# Altium PCB ESP32headerboard.PcbDoc
Units mm, origin at the board's own origin, x right, y up, seen from the top; angles counter-clockwise.
Board outline 60 x 60 mm, 2 copper layers (Top Layer, Bottom Layer); 6 components, 40 nets, 97 pads, 0 vias.
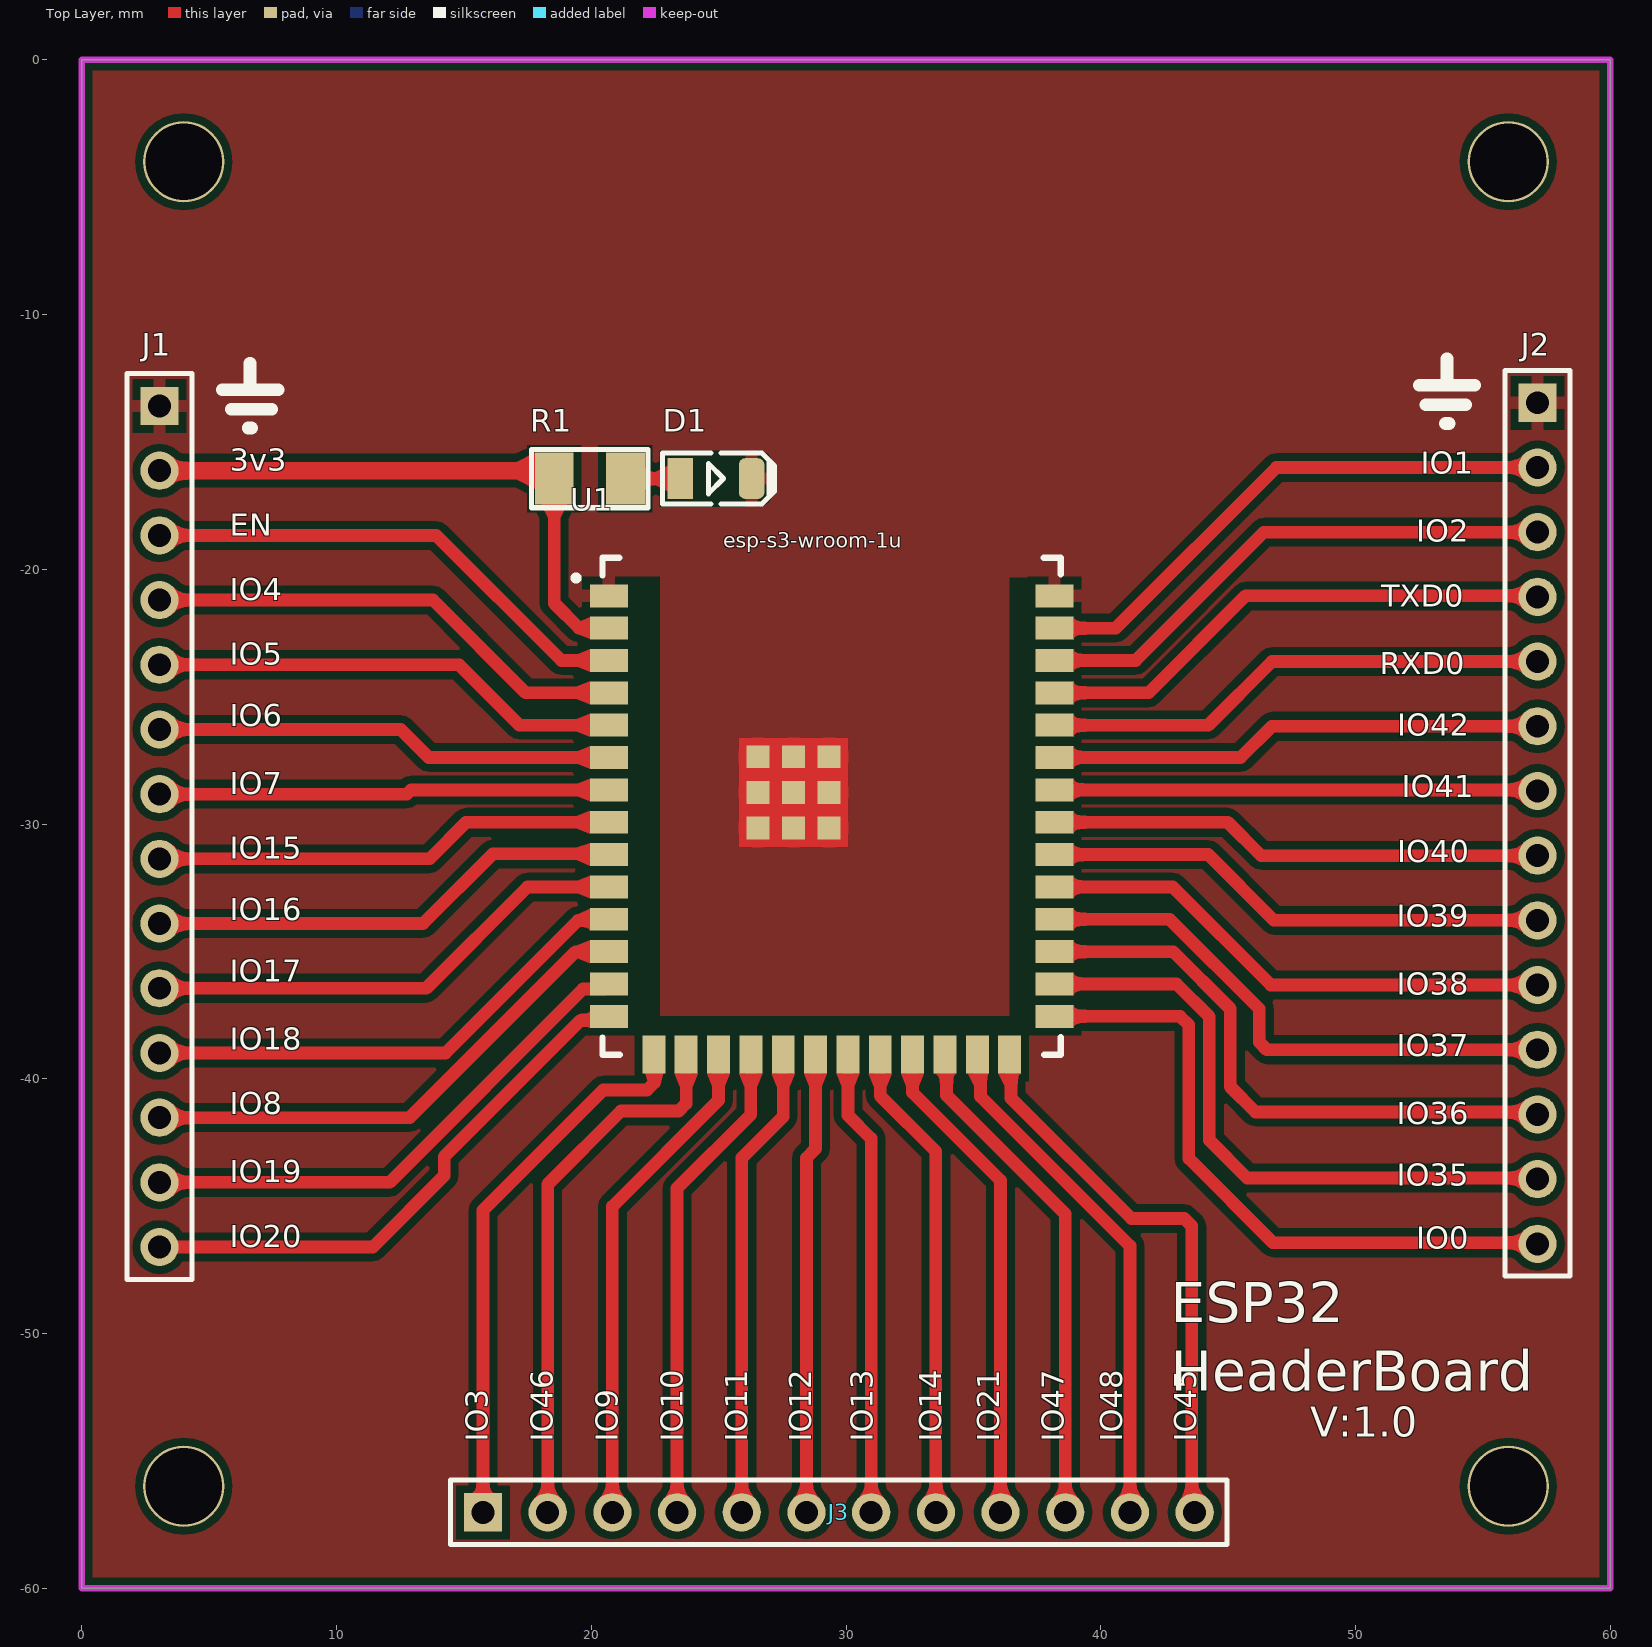
[diagram p0: Top Layer view]
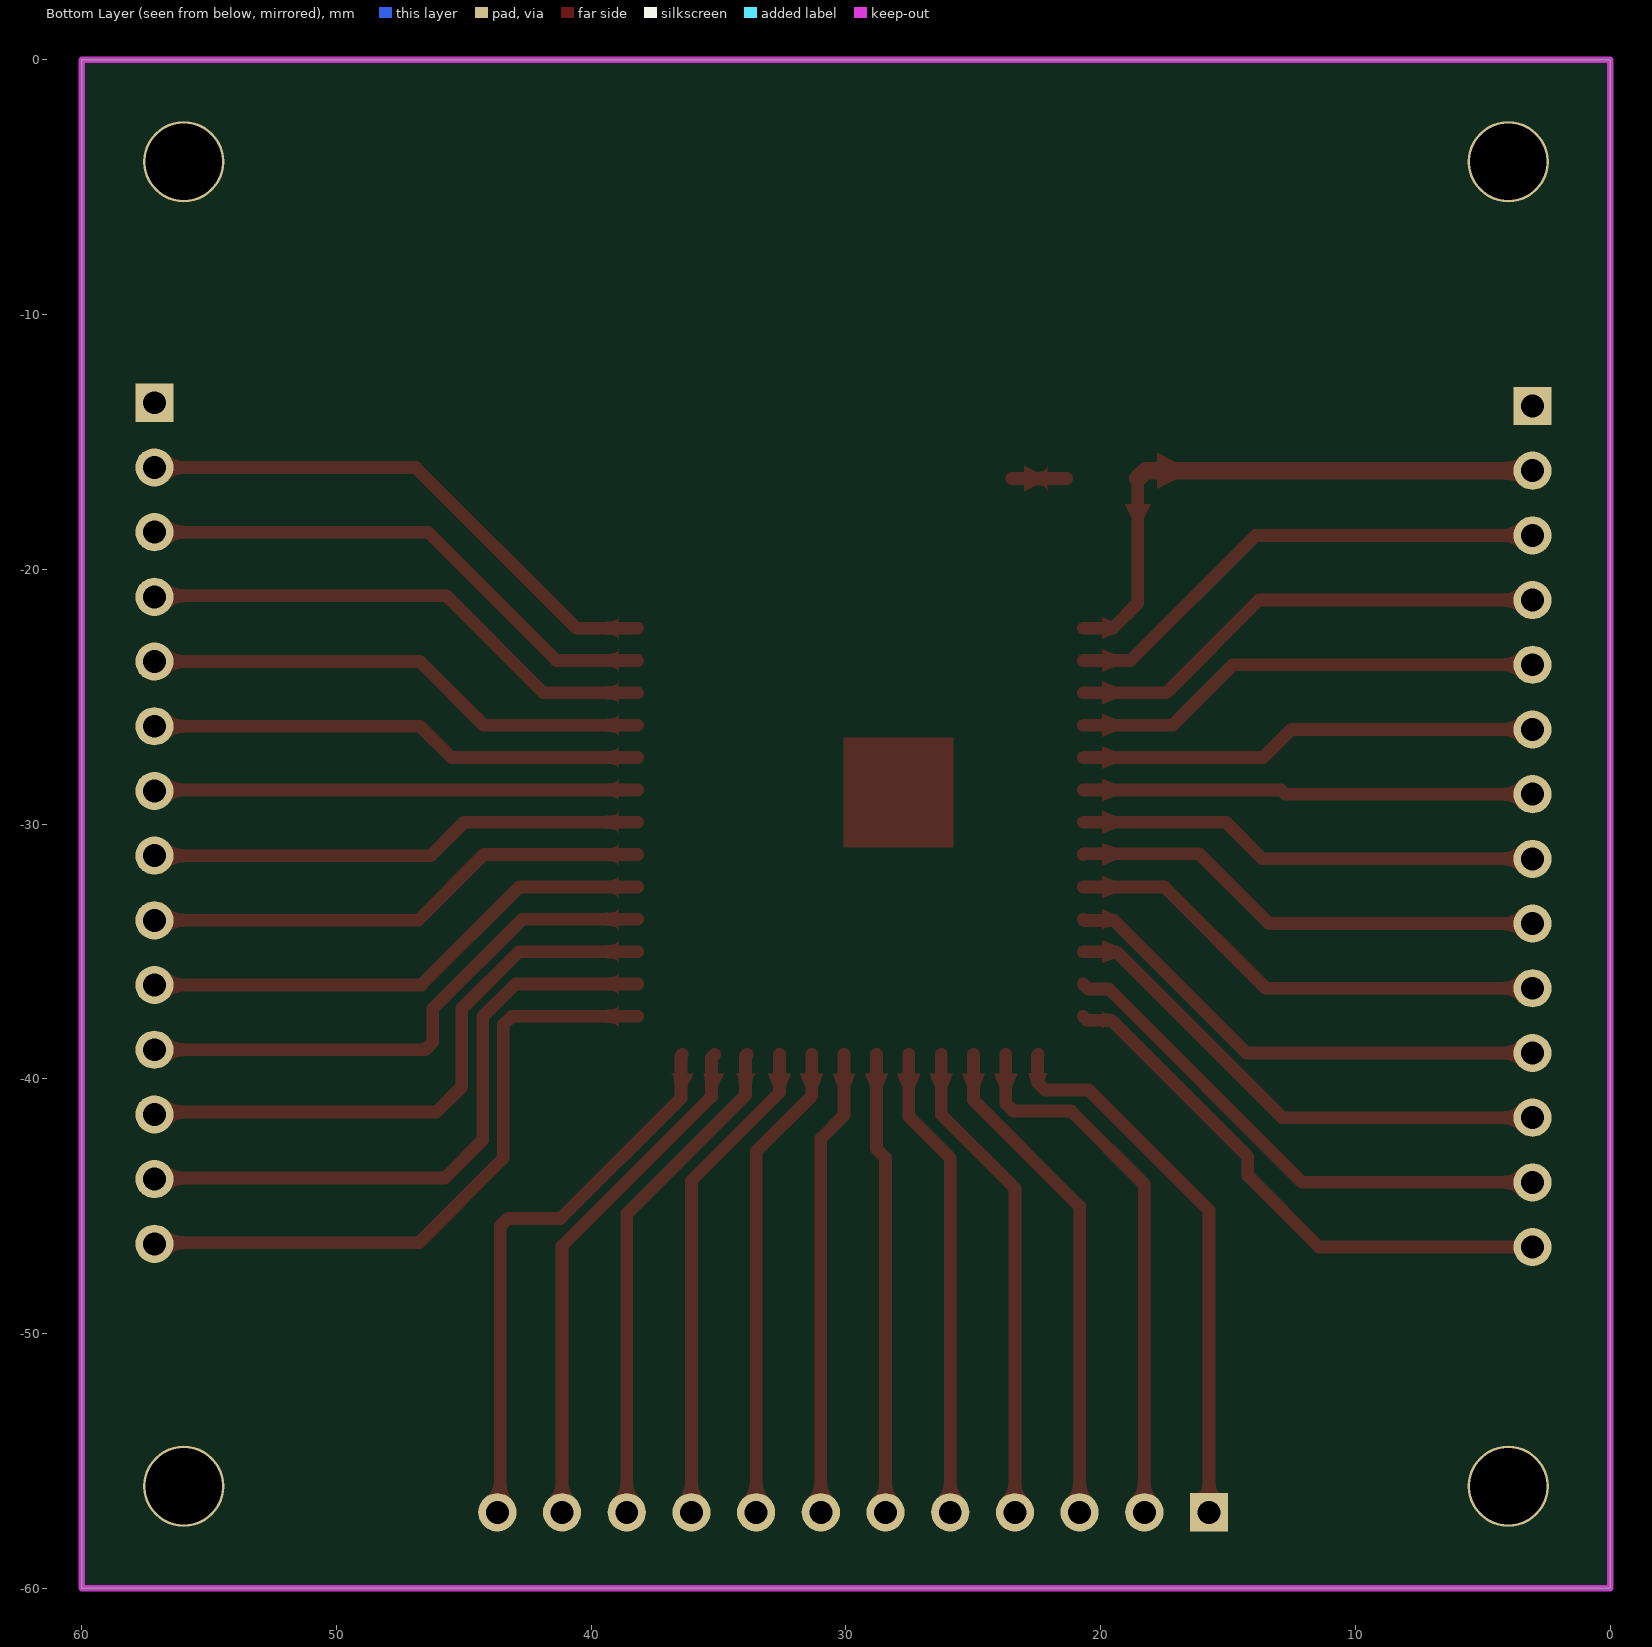
[diagram p1: Bottom Layer view, seen from below]
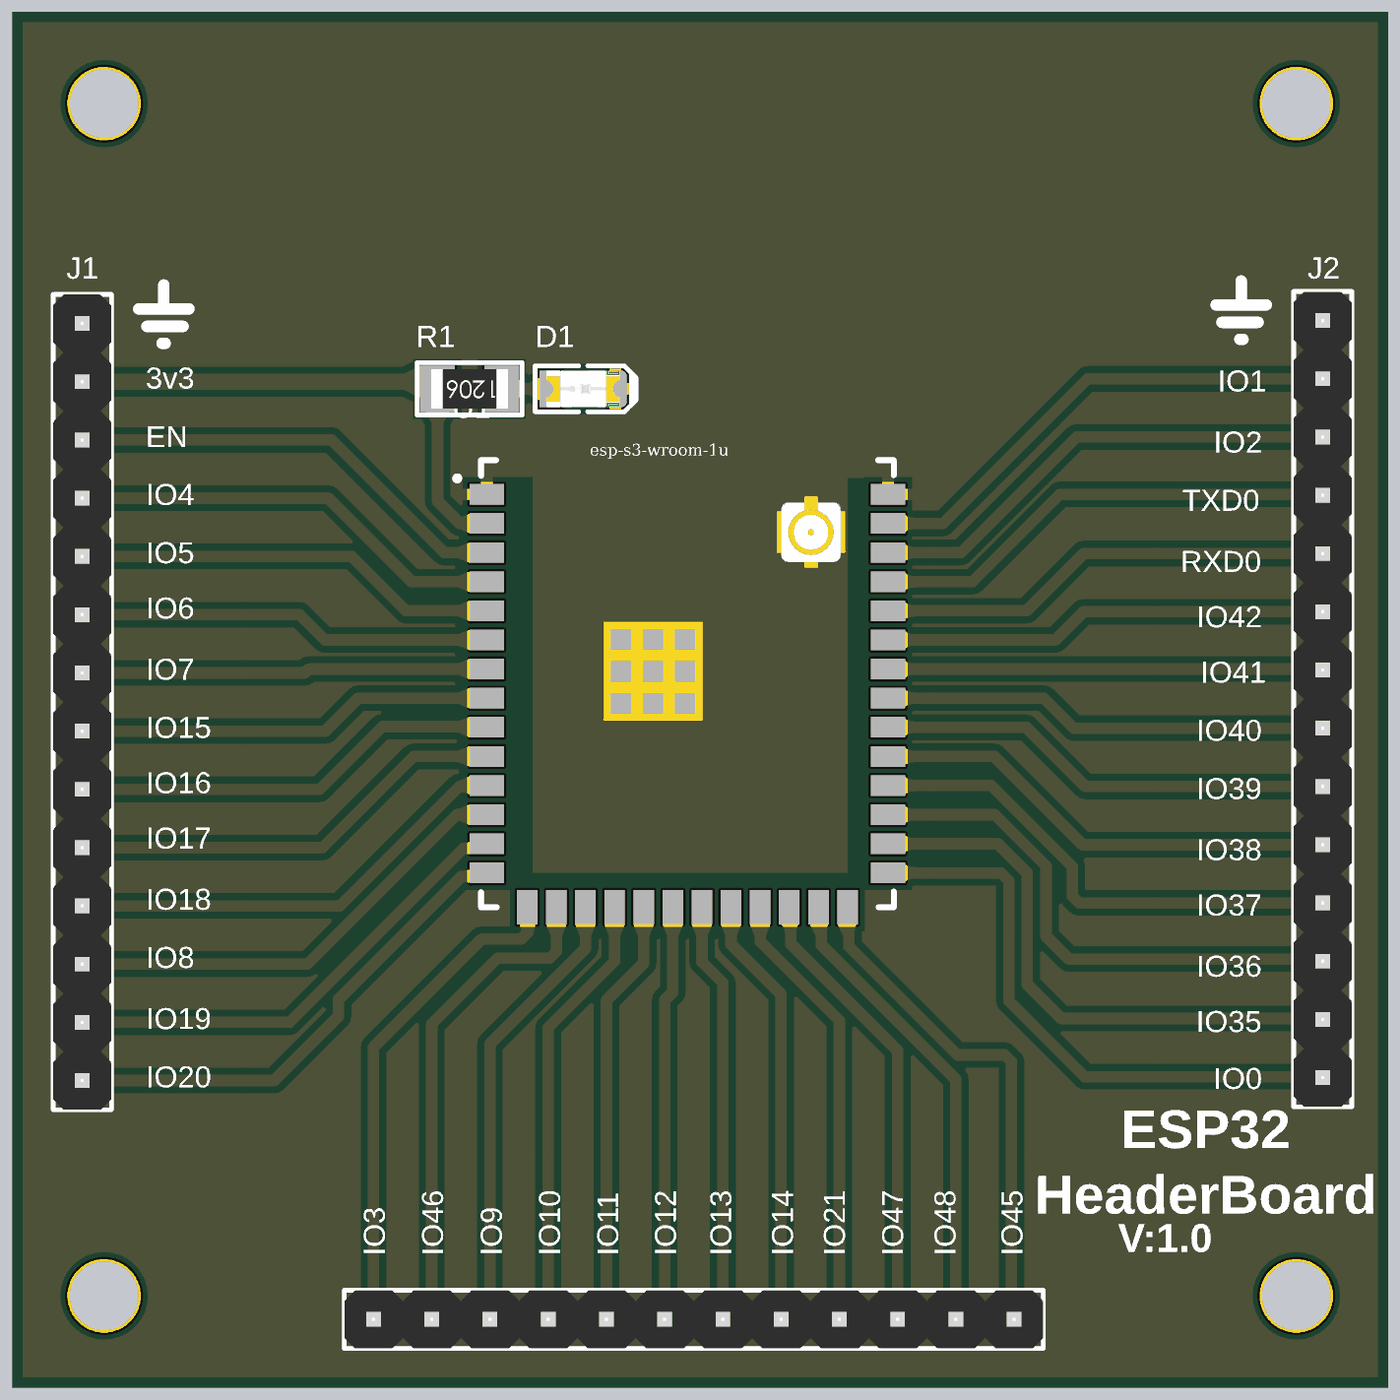
[diagram p2: 3D render of the assembled board from above, using the file's embedded part models]

## Layer stack, top to bottom
Top Solder: solder mask 0.0102, Solder Resist, Dk 3.5
Top Layer: signal copper 0.0356
Dielectric 1: dielectric 0.32, FR-4, Dk 4.8
Bottom Layer: signal copper 0.0356
Bottom Solder: solder mask 0.0102, Solder Resist, Dk 3.5

## Board outline
0,-60 0,0 60,0 60,-60

## Design rules (kind name [scope] priority, off if disabled: settings)
Clearance [All] p1: gap=0.3 ignorepadtopadclearanceinfootprint=FALSE
PolygonConnect [All] p1: connectstyle=Relief reliefconductorwidth=0.5 reliefentries=4 polygonreliefangle="90 Angle" airgapwidth=0.3
RoutingVias [All] p1: holewidth=0.711 width=1.27 viastyle="Through Hole" minholewidth=0.711 minwidth=1.27 maxholewidth=0.711 maxwidth=1.27
SolderMaskExpansion [All] p1: expansion=0.102 istentingtop=FALSE
Width [All] p1: maxlimit=1 minlimit=0.3 preferedwidth=0.5
30 further rules are at their usual default settings.

## Components (designator, comment, footprint, x,y, rotation, side; value= is the part's Value field where it differs from the comment)
D1 "LED SMD 1206" "LED SMD 1206 (Blue)" 24.895,-16.439 r0 top
J1 "HDRF14" "HDR 1X14" 3.048,-13.589 r270 top
J2 "HDRF14" "HDR 1X14" 57.15,-13.462 r270 top
J3 "HDRF12" "HDR 1X12" 15.748,-57.023 r0 top
R1 "Resistor SMD 1206" SMD-1206-RES 19.94,-16.439 r90 top value=1K
U1 "ESP32-S3-WROOM" ESP32-S3-WROOM-1U-N8R8 20.44,-39.051 r0 top

## Footprints (in the part's own frame and the unit in brackets; to place one, negate y for a bottom-side part, rotate by r counter-clockwise, add the part's x,y. Pads: shape width x height; smd on the part's side, far side on the other; paste and mask are expansions set on the pad)
ESP32-S3-WROOM-1U-N8R8 [mm] "Designed by :MJKhodami"
  rect 1.5x0.9 smd: 2(0.25,16.74) 3(0.25,15.47) 4(0.25,14.2) 5(0.25,12.93) 6(0.25,11.66) 7(0.25,10.39) 8(0.25,9.12) 9(0.25,7.85) 10(0.25,6.58) 11(0.25,5.31) 12(0.25,4.04) 13(0.25,2.77) 14(0.25,1.5) 27(17.75,1.5) 28(17.75,2.77) 29(17.75,4.04) 30(17.75,5.31) 31(17.75,6.58) 32(17.75,7.85) 33(17.75,9.12) 34(17.75,10.39) 35(17.75,11.66) 36(17.75,12.93) 37(17.75,14.2) 38(17.75,15.47) 39(17.75,16.74) GND(0.25,18.01) GND(17.75,18.01)
  rect 0.9x1.5 smd: 15(2.015,0) 16(3.285,0) 17(4.555,0) 18(5.825,0) 19(7.095,0) 20(8.365,0) 21(9.635,0) 22(10.905,0) 23(12.175,0) 24(13.445,0) 25(14.715,0) 26(15.985,0)
  rect 0.9x0.9 smd: GND(6.1,8.89) GND(6.1,10.29) GND(6.1,11.69) GND(7.5,8.89) GND(7.5,10.29) GND(7.5,11.69) GND(8.9,8.89) GND(8.9,10.29) GND(8.9,11.69)
  silkscreen extent -1.13,0 18,19.5, body extent 0,0 18,19.44, height 2
"HDR 1X12" [mm] "Connector; Header; 12 Position"
  rect 1.5x1.5 hole 0.9: 1(0,0)
  round 1.5 hole 0.9: 2(2.54,0) 3(5.08,0) 4(7.62,0) 5(10.16,0) 6(12.7,0) 7(15.24,0) 8(17.78,0) 9(20.32,0) 10(22.86,0) 11(25.4,0) 12(27.94,0)
  silkscreen extent -1.27,-1.27 29.21,1.27, body extent -1.26,-1.27 29.21,1.26, height 8.51
"HDR 1X14" [mm] "Connector; Header; 14 Position"
  rect 1.5x1.5 hole 0.9: 1(0,0)
  round 1.5 hole 0.9: 2(2.54,0) 3(5.08,0) 4(7.62,0) 5(10.16,0) 6(12.7,0) 7(15.24,0) 8(17.78,0) 9(20.32,0) 10(22.86,0) 11(25.4,0) 12(27.94,0) 13(30.48,0) 14(33.02,0)
  silkscreen extent -1.27,-1.27 34.29,1.27, body extent -1.26,-1.27 34.29,1.26, height 8.51
"LED SMD 1206 (Blue)" [mm]
  rect 1x1.6 smd mask+0.075: 1(-1.4,0)
  rrect50% 1x1.6 smd mask+0.075: 2(1.4,0)
  Top Layer pour cut-out: -1.1,1.1 -1.1,-1.1 1.1,-1.1 1.1,1.1
  silkscreen extent -2.1,-1 2.3,1, body extent -1.6,-0.8 1.6,0.8, height 0.68
SMD-1206-RES [mil]
  rect 80x60 smd: 1(0,55) 2(0,-55)
  silkscreen extent -45,-90 45,90, body extent -34,-66 34,66, height 33

## Part data
J1 J2: library part HDR_1X14, "CONN, HEADER, Female, pitch: 2.54mm, 14POS", ComponentLink1Description="Our website:", ComponentLink1URL=https://www.spaceomid.com/, Designed by=MJKhodami
J3: library part HDR_1X12, "CONN, HEADER, Female, pitch: 2.54mm, 12POS", ComponentLink1Description="Our website:", ComponentLink1URL=https://www.spaceomid.com/, Designed by=MJKhodami
U1: library part ESP32-S3-WROOM-1U-N8R8, ComponentLink1Description="Our website", ComponentLink1URL=https://www.spaceomid.com/, Designed by=MJKhodami
D1: ComponentLink1Description="Our website:", ComponentLink1URL=https://www.spaceomid.com/, Designed by=MJKhodami
R1: ComponentLink3Description="Our Website:", ComponentLink3URL=https://www.spaceomid.com/, Designed by=MJKhodami

## Free pads (board coordinates)
  round 3.2 hole 3: 2(4,-56) 2(4,-4) 2(56,-56) 2(56,-4)

## Nets (pads, with @x,y where several pads share a name; then routed paths per layer and width w, separated by ;. In a path a pad name is that pad's centre, name@x,y a point inside that pad or via, vN(x,y) a via of type N, cw(c..) or ccw(c..) an arc to the next point about the centre after c; other vN are vias at no path point)
15: J3.1 U1.15 | length 21.8
  Top Layer w0.5: J3.1 15.748,-45.161 20.467,-40.442 22.186,-40.442 22.479,-40.149 22.479,-39.075 U1.15
16: J3.2 U1.16 | length 21.6
  Top Layer w0.5: J3.2 18.288,-44.145 21.166,-41.267 23.432,-41.267 23.725,-40.974 U1.16
17: J3.3 U1.17 | length 19.7
  Top Layer w0.5: J3.3 20.828,-45.014 24.995,-40.847 U1.17
18: J3.4 U1.18 | length 19.2
  Top Layer w0.5: J3.4 23.368,-44.298 26.265,-41.401 U1.18
19: J3.5 U1.19 | length 18.6
  Top Layer w0.5: J3.5 25.908,-43.109 27.535,-41.482 U1.19
20: J3.6 U1.20 | length 18.1
  Top Layer w0.5: J3.6 28.448,-43.109 28.805,-42.752 U1.20
21: J3.7 U1.21 | length 18.4
  Top Layer w0.5: U1.21 30.075,-41.434 30.988,-42.347 J3.7
22: J3.8 U1.22 | length 18.9
  Top Layer w0.5: U1.22 31.345,-40.672 33.528,-42.855 J3.8
23: J3.9 U1.23 | length 19.4
  Top Layer w0.5: U1.23 32.615,-40.545 36.068,-43.998 J3.9
24: J3.10 U1.24 | length 19.9
  Top Layer w0.5: U1.24 33.946,-39.112 33.946,-40.652 38.608,-45.314 J3.10
25: J3.11 U1.25 | length 20.5
  Top Layer w0.5: U1.25 35.282,-39.178 35.282,-40.697 41.148,-46.563 J3.11
26: J3.12 U1.26 | length 22.2
  Top Layer w0.5: U1.26 36.482,-39.108 36.482,-40.766 41.208,-45.492 43.281,-45.492 43.574,-45.785 43.574,-56.909 J3.12
GND: D1.2 J1.1 J2.1 U1.GND
NetD1_1: D1.1 R1.2 | length 2.2
  Top Layer w0.5: R1.2 D1.1
NetJ1_2: J1.2 R1.1 U1.2 | length 23.1
  Top Layer w0.5: R1.1 18.543,-21.336 19.518,-22.311 U1.2
  Top Layer w0.7: J1.2 18.233,-16.129 R1.1
NetJ1_3: J1.3 U1.3 | length 19.7
  Top Layer w0.5: J1.3 13.914,-18.669 18.826,-23.581 U1.3
NetJ1_4: J1.4 U1.4 | length 19.2
  Top Layer w0.5: J1.4 13.787,-21.209 17.429,-24.851 U1.4
NetJ1_5: J1.5 U1.5 | length 18.6
  Top Layer w0.5: J1.5 14.803,-23.749 17.175,-26.121 U1.5
NetJ1_6: J1.6 U1.6 | length 18.1
  Top Layer w0.5: J1.6 12.517,-26.289 13.619,-27.391 U1.6
NetJ1_7: J1.7 U1.7 | length 17.7
  Top Layer w0.5: J1.7 12.756,-28.829 12.924,-28.661 U1.7
NetJ1_8: J1.8 U1.8 | length 18.2
  Top Layer w0.5: J1.8 13.645,-31.369 15.083,-29.931 U1.8
NetJ1_9: J1.9 U1.9 | length 18.8
  Top Layer w0.5: J1.9 13.391,-33.909 16.129,-31.171 20.66,-31.171 U1.9
NetJ1_10: J1.10 U1.10 | length 19.3
  Top Layer w0.5: J1.10 13.518,-36.449 17.496,-32.471 U1.10
NetJ1_11: J1.11 U1.11 | length 19.8
  Top Layer w0.5: J1.11 14.28,-38.989 19.483,-33.786 20.645,-33.786 U1.11
NetJ1_12: J1.12 U1.12 | length 20.3
  Top Layer w0.5: J1.12 12.871,-41.529 19.389,-35.011 U1.12
NetJ1_13: J1.13 U1.13 | length 21
  Top Layer w0.5: J1.13@2.912,-44.069 12.088,-44.069 19.676,-36.481 20.49,-36.481 U1.13
NetJ1_14: J1.14 U1.14 | length 21.8
  Top Layer w0.5: J1.14 11.424,-46.609 14.224,-43.809 14.224,-43.064 19.583,-37.705 20.536,-37.705 U1.14
NetJ2_2: J2.2 U1.39 | length 21.6
  Top Layer w0.5: U1.39 40.588,-22.311 46.897,-16.002 J2.2
NetJ2_3: J2.3 U1.38 | length 21
  Top Layer w0.5: U1.38 41.372,-23.581 46.411,-18.542 J2.3
NetJ2_4: J2.4 U1.37 | length 20.5
  Top Layer w0.5: U1.37 41.88,-24.851 45.69,-21.041 J2.4@57.15,-21.041
NetJ2_5: J2.5 U1.36 | length 20
  Top Layer w0.5: U1.36 44.221,-26.121 46.72,-23.622 J2.5
NetJ2_6: J2.6 U1.35 | length 19.5
  Top Layer w0.5: U1.35 45.491,-27.391 46.72,-26.162 J2.6
NetJ2_7: J2.7 U1.34 | length 19
  Top Layer w0.5: U1.34 57.109,-28.661 J2.7
NetJ2_8: J2.8 U1.33 | length 19.5
  Top Layer w0.5: U1.33 44.988,-29.931 46.299,-31.242 J2.8
NetJ2_9: J2.9 U1.32 | length 20
  Top Layer w0.5: U1.32 44.221,-31.201 46.802,-33.782 J2.9
NetJ2_10: J2.10 U1.31 | length 20.6
  Top Layer w0.5: U1.31 42.829,-32.471 46.68,-36.322 J2.10
NetJ2_11: J2.11 U1.30 | length 21.8
  Top Layer w0.5: U1.30 42.702,-33.741 46.228,-37.267 46.228,-38.569 46.521,-38.862 J2.11
NetJ2_12: J2.12 U1.29 | length 23.4
  Top Layer w0.5: U1.29 42.841,-35.011 45.085,-37.255 45.085,-40.315 46.08,-41.31 J2.12@57.15,-41.31
NetJ2_13: J2.13 U1.28 | length 25
  Top Layer w0.5: U1.28 42.979,-36.281 44.261,-37.563 44.261,-42.412 45.75,-43.901 J2.13@57.15,-43.901
NetJ2_14: J2.14 U1.27 | length 25.7
  Top Layer w0.5: U1.27 43.118,-37.551 43.461,-37.894 43.461,-43.136 46.766,-46.441 J2.14@57.15,-46.441

## Polygon pours and split planes (outlines as drawn)
GND on Top Layer "Top Layer-GND" (solid, remove dead copper, pour order 0): 0,-60 0,0 60,0 60,-60

## Keep-outs
Keep-Out Layer:
  the board outline again, w0.254

## Other copper
Top Layer:
  rectangle net GND: 25.781,-30.917 30.099,-26.599
  pour cut-out: 22.069,-20.287 22.695,-20.294 22.695,-37.551 36.425,-37.551 36.425,-20.337 37.186,-20.337 37.186,-38.255 37.14,-38.301 21.44,-38.301 21.44,-20.294

## Silkscreen, mask and mechanical layers (free items; w line width, h text height)
Top Overlay:
  lines w0.5: 5.512,-12.954 7.696,-12.954 ; 5.867,-13.716 7.442,-13.716 ; 6.528,-14.453 6.66,-14.453 ; 6.604,-12.954 6.604,-11.911 ; 52.502,-12.778 54.686,-12.778 ; 52.756,-13.54 54.331,-13.54 ; 53.538,-14.276 53.67,-14.276 ; 53.594,-12.778 53.594,-11.735
  text "3v3" at 5.811,-16.422 h1.5
  text "IO1" at 52.563,-16.549 h1.5
  text "EN" at 5.811,-18.979 h1.5
  text "IO2" at 52.386,-19.216 h1.5
  text "IO4" at 5.811,-21.502 h1.5
  text "TXD0" at 51.02,-21.756 h1.5
  text "IO5" at 5.811,-24.042 h1.5
  text "RXD0" at 50.945,-24.423 h1.5
  text "IO6" at 5.811,-26.455 h1.5
  text "IO42" at 51.64,-26.836 h1.5
  text "IO7" at 5.811,-29.122 h1.5
  text "IO41" at 51.816,-29.249 h1.5
  text "IO15" at 5.811,-31.662 h1.5
  text "IO40" at 51.633,-31.789 h1.5
  text "IO16" at 5.811,-34.075 h1.5
  text "IO39" at 51.629,-34.329 h1.5
  text "IO17" at 5.811,-36.488 h1.5
  text "IO38" at 51.629,-36.996 h1.5
  text "IO18" at 5.811,-39.155 h1.5
  text "IO37" at 51.631,-39.409 h1.5
  text "IO8" at 5.811,-41.695 h1.5
  text "IO36" at 51.631,-42.076 h1.5
  text "IO19" at 5.811,-44.362 h1.5
  text "IO35" at 51.624,-44.489 h1.5
  text "IO20" at 5.811,-46.902 h1.5
  text "IO0" at 52.379,-46.973 h1.5
  text "ESP32 / HeaderBoard" at 42.757,-52.787 h2.7
  text "IO3" at 16.239,-54.248 h1.5 r90
  text "IO46" at 18.779,-54.248 h1.5 r90
  text "IO9" at 21.342,-54.248 h1.5 r90
  text "IO10" at 23.882,-54.248 h1.5 r90
  text "IO11" at 26.422,-54.248 h1.5 r90
  text "IO12" at 28.939,-54.248 h1.5 r90
  text "IO13" at 31.352,-54.248 h1.5 r90
  text "IO14" at 34.042,-54.248 h1.5 r90
  text "IO21" at 36.305,-54.248 h1.5 r90
  text "IO47" at 38.845,-54.248 h1.5 r90
  text "IO48" at 41.131,-54.248 h1.5 r90
  text "IO45" at 44.052,-54.248 h1.5 r90
  text "V:1.0" at 48.221,-54.455 h2
Top Solder:
  rectangle: 25.781,-30.917 30.099,-26.599

## Dimensions
60,0 to 60,-60 on Mechanical 2
0,0 to 60,0 on Mechanical 2

## Text inside footprints (layer, text, board x,y; h text height)
U1: Top Overlay "esp-s3-wroom-1u" at 25.181,-19.349 h1